# Altium PCB SimpleNode3.PcbDoc
Units mm, origin at the board's own origin, x right, y up, seen from the top; angles counter-clockwise.
Board outline 152.4 x 101.6 mm, 2 copper layers (Top Layer, Bottom Layer); 45 components, 43 nets, 176 pads, 13 vias.
Unrouted connection lines stored in the file: 68.
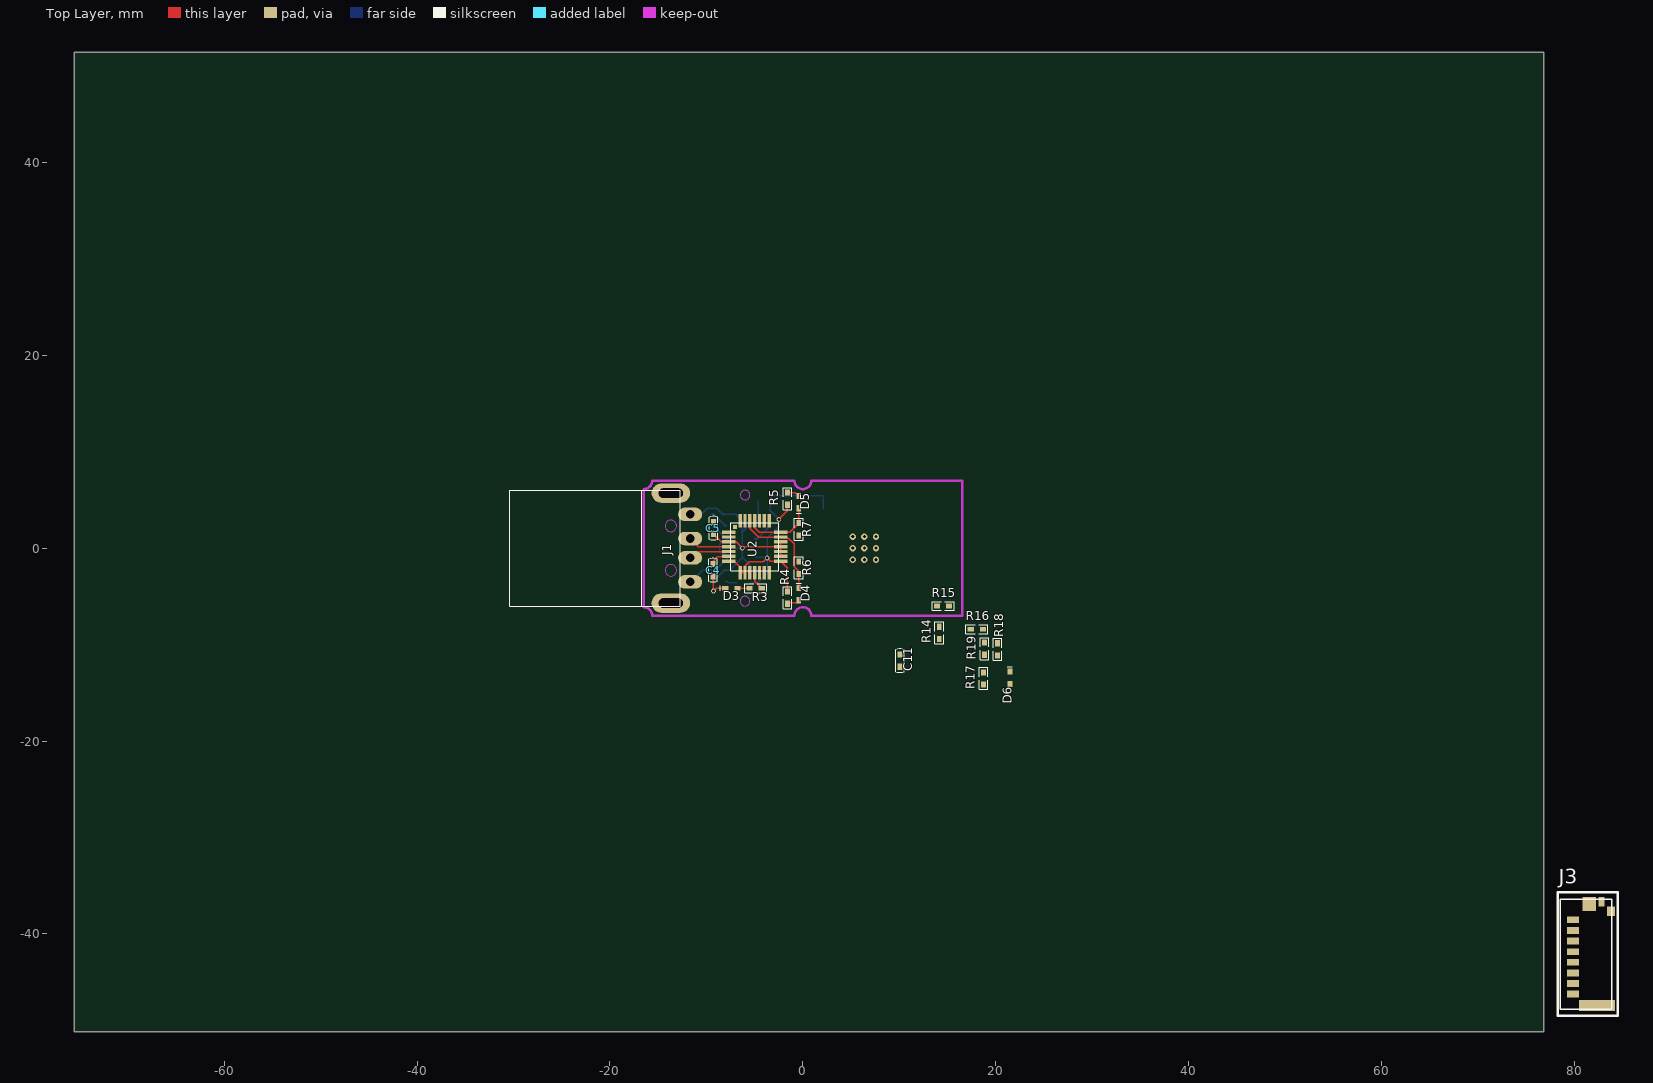
[diagram p0: Top Layer view]
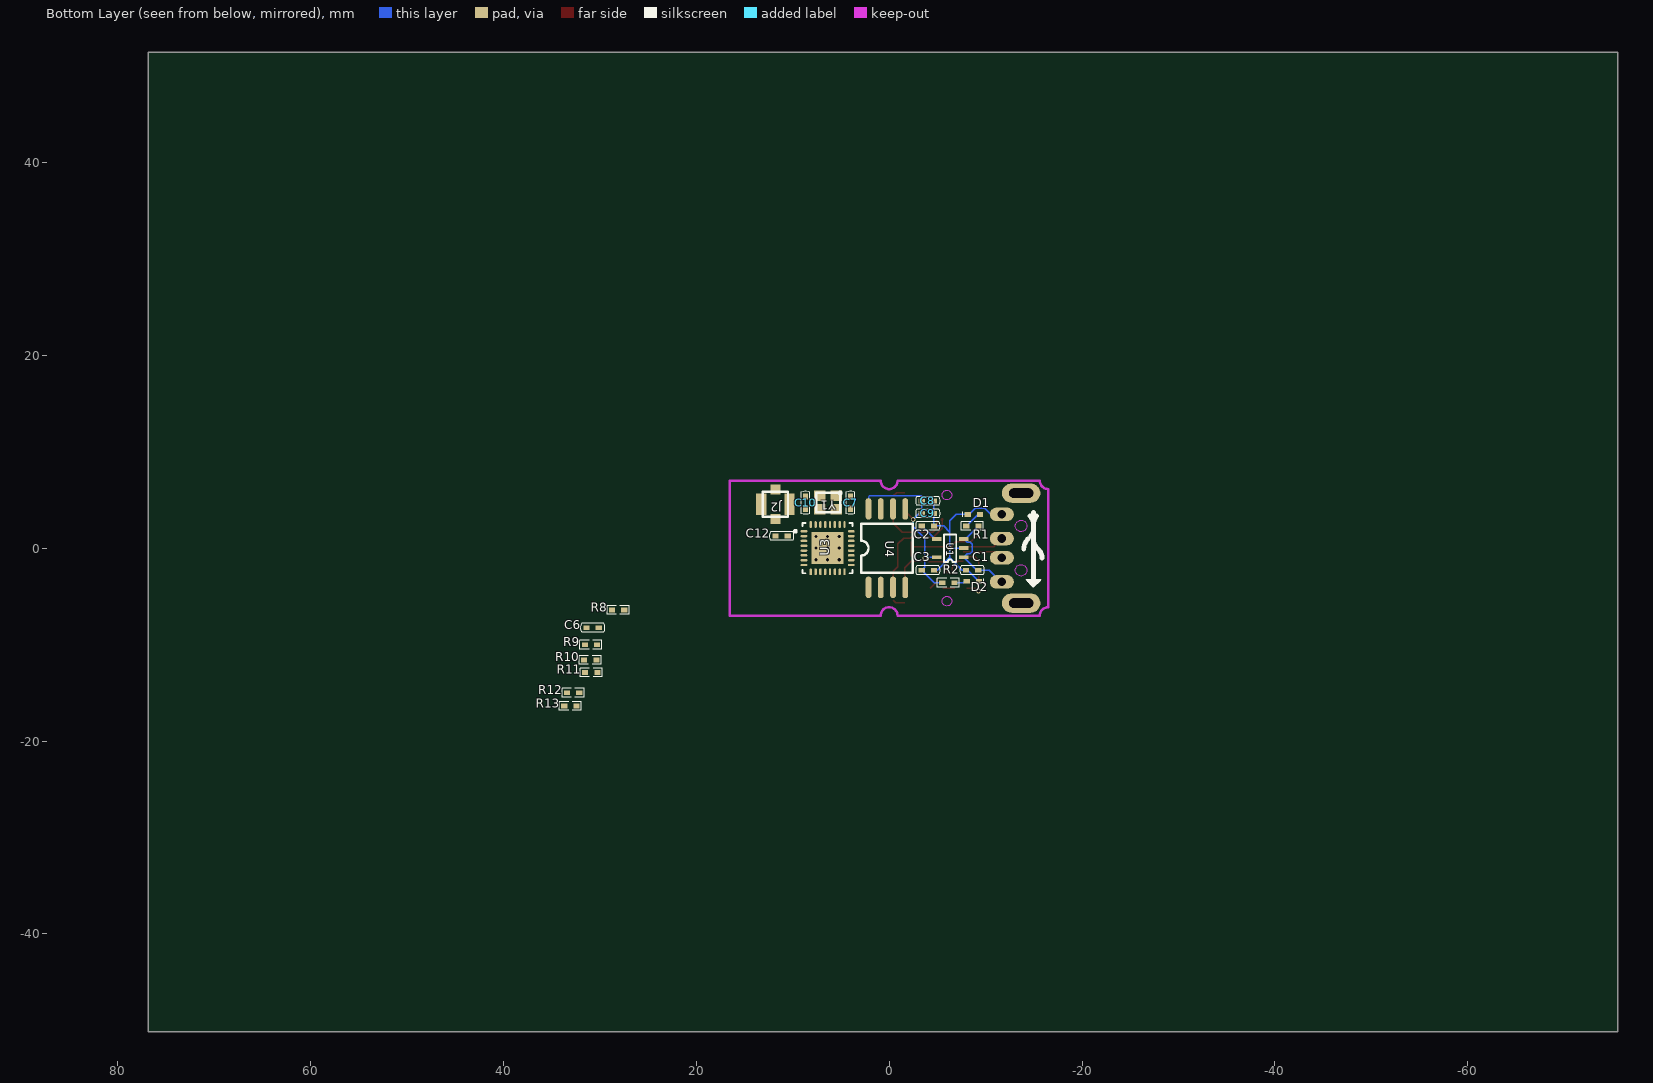
[diagram p1: Bottom Layer view, seen from below]

## Layer stack, top to bottom
Top Layer: signal copper 0.0356
Dielectric: dielectric 0.32, FR-4, Dk 4.8
Bottom Layer: signal copper 0.0356

## Board outline
-75.565,-50.165 76.835,-50.165 76.835,51.435 -75.565,51.435

## Design rules (kind name [scope] priority, off if disabled: settings)
Clearance [All] p1: gap=0.152
DiffPairsRouting DiffPair_DiffPairsRouting [InDifferentialPair ('USB Data Line Pair')] p1: maxlimit=0.254 minlimit=0.254 mostfreqgap=0.254 maxuncoupledlength=12.7
DiffPairsRouting [All] p2: maxlimit=0.254 minlimit=0.254 mostfreqgap=0.254 maxuncoupledlength=12.7
MatchedLengths DiffPair_MatchedLengths [InDifferentialPair ('USB Data Line Pair')] p1: tolerance=25.4 checknetsindiffpair=TRUE checkdiffpairvsdiffpair=TRUE checkothers=TRUE
MinimumSolderMaskSliver [All] p1 off: minsoldermaskwidth=0.127
PolygonConnect [All] p1: connectstyle=Relief reliefconductorwidth=0.254 reliefentries=4 polygonreliefangle="90 Angle"
RoutingVias [All] p1: holewidth=0.711 width=1.27 viastyle="Through Hole" minholewidth=0.305 minwidth=0.483 maxholewidth=0.711 maxwidth=1.27
SilkToSilkClearance [All] p1 off: silktosilkclearance=0
SilkscreenOverComponentPads [All] p1 off: minsilkscreentomaskgap=0.254
SolderMaskExpansion [All] p1: expansion=0.102
Width DiffPair_Width [InDifferentialPair('USB Data Line Pair')] p1: maxlimit=0.254 minlimit=0.152 preferedwidth=0.254
Width [All] p2: maxlimit=0.254 minlimit=0.152 preferedwidth=0.152
24 further rules are at their usual default settings.

## Classes and differential pairs
differential pair "USB Data Line Pair": +UD_P -UD_N

## Components (designator, comment, footprint, x,y, rotation, side; value= is the part's Value field where it differs from the comment)
C1 "105" C0402 -8.611,-2.286 r180 bottom
C2 "CAP" C0402 -4.013,2.311 r0 bottom
C3 "CAP" C0402 -4.013,-2.286 r0 bottom
C4 "CAP" C0402 -9.319,-2.286 r90 top
C5 "CAP" C0402 -9.271,2.083 r270 top
C6 "10V" C0402 30.734,-8.255 r180 bottom
C7 "10V" C0402 3.988,4.724 r270 bottom
C8 "10V" C0402 -4.013,4.902 r0 bottom
C9 "10V" C0402 -4.013,3.607 r0 bottom
C10 "10V" C0402 8.661,4.724 r90 bottom
C11 "10V" C0402 10.058,-11.659 r90 top
C12 "10V" C0402 11.151,1.245 r180 bottom
D1 "PW5V" LED0402 -8.788,3.505 r0 bottom
D2 "LED" LED0402 -8.687,-3.429 r180 bottom
D3 "STA" LED0402 -7.417,-4.166 r180 top
D4 "TXD" LED0402 -0.432,-4.775 r90 top
D5 "LED" LED0402 -0.432,4.775 r270 top
D6 "RST" LED0402 21.463,-13.437 r90 top
J1 "USB-A" "USB-A 公头" -13.691,0 r0 top
J2 "50ohm" "IPEX-1 底座" 11.786,4.547 r270 bottom
J3 "Micro TFCard" "TFCard 卡座 短体" 84.506,-48.489 r90 top
R1 "5%" R0402 -8.636,2.311 r180 bottom
R2 "5%" R0402 -6.147,-3.581 r180 bottom
R3 "5%" R0402 -4.902,-4.166 r0 top
R4 "5%" R0402 -1.6,-5.131 r270 top
R5 "5%" R0402 -1.6,5.131 r270 top
R6 "5%" R0402 -0.432,-2.032 r90 top
R7 "5%" R0402 -0.432,1.956 r270 top
R8 "1%" R0402 28.092,-6.401 r0 bottom
R9 "1%" R0402 30.912,-10.008 r180 bottom
R10 "1%" R0402 30.988,-11.582 r180 bottom
R11 "1%" R0402 30.886,-12.878 r180 bottom
R12 "5%" R0402 32.766,-14.986 r0 bottom
R13 "FLASH" R0402 33.045,-16.358 r180 bottom
R14 "1%" R0402 14.148,-8.788 r270 top
R15 "1%" R0402 14.529,-5.994 r0 top
R16 "NC" R0402 18.034,-8.407 r180 top
R17 "5%" R0402 18.72,-13.513 r90 top
R18 "5%" R0402 20.168,-10.49 r270 top
R19 "RESET" R0402 18.821,-10.414 r90 top
U1 "SPX3819M5-L-3-3" SOT25-5 -6.325,0.076 r0 bottom locked
U2 "CP2102" MLP28 -5.055,0 r0 top locked
U3 "ESP8266" QFN32L 6.375,0 r180 bottom
U4 "2M Flash" SOIC8 2.134,-4.064 r90 bottom
Y1 "10ppm" XTAL-2520 6.325,4.724 r0 bottom

## Footprints (in the part's own frame and the unit in brackets; to place one, negate y for a bottom-side part, rotate by r counter-clockwise, add the part's x,y. Pads: shape width x height; smd on the part's side, far side on the other; paste and mask are expansions set on the pad)
C0402 [mm]
  rect 0.635x0.5 smd: 1(-0.635,0) 2(0.635,0)
  silkscreen extent -1.22,-0.45 1.22,0.45
"IPEX-1 底座" [mm]
  rect 1.05x1 smd: 1(1.525,0) 4(-1.525,0)
  rect 2.2x1.05 smd: 2(0,1.475) 3(0,-1.475)
  silkscreen extent -1.3,-1.3 1.3,1.3
LED0402 [mm]
  rect 0.635x0.5 smd: 1(-0.632,0) 2(0.633,0)
  silkscreen extent 1.14,-0.25 1.14,0.25
MLP28 [mm]
  rect 1.4x0.35 smd: 1(-2.646,1.651) 2(-2.646,1.151) 3(-2.646,0.651) 4(-2.646,0.151) 5(-2.646,-0.349) 6(-2.646,-0.849) 7(-2.646,-1.349) 15(2.754,-1.349) 16(2.754,-0.849) 17(2.754,-0.349) 18(2.754,0.151) 19(2.754,0.651) 20(2.754,1.151) 21(2.754,1.651)
  rect 0.35x1.4 smd: 8(-1.446,-2.549) 9(-0.946,-2.549) 10(-0.446,-2.549) 11(0.054,-2.549) 12(0.554,-2.549) 13(1.054,-2.549) 14(1.554,-2.549) 22(1.554,2.851) 23(1.054,2.851) 24(0.554,2.851) 25(0.054,2.851) 26(-0.446,2.851) 27(-0.946,2.851) 28(-1.446,2.851)
  rect 0.435x0.435 smd: ""(-1.978,2.183)
  silkscreen extent -2.45,-2.35 2.55,2.65
QFN32L [mm]
  oval 0.7x0.25 smd: 1(-2.45,1.75) 2(-2.45,1.25) 3(-2.45,0.75) 4(-2.45,0.25) 5(-2.45,-0.25) 6(-2.45,-0.75) 7(-2.45,-1.25) 8(-2.45,-1.75) 17(2.45,-1.75) 18(2.45,-1.25) 19(2.45,-0.75) 20(2.45,-0.25) 21(2.45,0.25) 22(2.45,0.75) 23(2.45,1.25) 24(2.45,1.75)
  oval 0.25x0.7 smd: 9(-1.75,-2.45) 10(-1.25,-2.45) 11(-0.75,-2.45) 12(-0.25,-2.45) 13(0.25,-2.45) 14(0.75,-2.45) 15(1.25,-2.45) 16(1.75,-2.45) 25(1.75,2.45) 26(1.25,2.45) 27(0.75,2.45) 28(0.25,2.45) 29(-0.25,2.45) 30(-0.75,2.45) 31(-1.25,2.45) 32(-1.75,2.45)
  rect 3.3x3.3 smd: 33(0,0)
  silkscreen extent -3.48,-2.6 2.6,2.6, body extent -2.58,-2.58 2.58,2.58, height 0.8
R0402 [mm]
  rect 0.635x0.5 smd: 1(-0.635,0) 2(0.635,0)
  silkscreen extent -1.14,-0.45 1.14,0.45
SOIC8 [mil]
  oval 88x24 smd: 1(0,0) 2(0,-50) 3(0,-100) 4(0,-150) 5(320,-150) 6(320,-100) 7(320,-50) 8(320,0)
  silkscreen extent 60,-180 260,30, body extent -5,-181 325,31, height 91
SOT25-5 [mm]
  rect 1x0.4 smd: 1(-1.397,1.016) 2(-1.397,0.066) 3(-1.397,-0.884) 4(1.403,-0.884) 5(1.403,1.016)
  silkscreen extent -0.64,-1.36 0.64,1.49
"TFCard 卡座 短体" [mm]
  rect 0.7x1.25 smd: 1(9.95,4.675) 2(8.85,4.675) 3(7.75,4.675) 4(6.65,4.675) 5(5.55,4.675) 6(4.45,4.675) 7(3.35,4.675) 8(2.25,4.675)
  rect 1.15x3.75 smd: 9(1.08,2.175)
  rect 1.45x1.4 smd: 10(11.585,2.95)
  rect 1x0.6 smd: 11(11.81,1.7)
  rect 0.95x0.85 smd: 12(10.835,0.725)
  silkscreen extent 0,0 12.8,6.25
"USB-A 公头" [mm]
  oval 1.5x1.4 on Bottom Overlay: 1(-1.27,3.683)
  oval 2.5x1.4 hole 0.9: 1(2,-3.5) 2(2,-1) 3(2,1) 4(2,3.5)
  oval 4x2 hole 1 slot 2.5 at 0 deg: 4(0,-5.7) 4(0,5.7)
  Keep-Out Layer circle w0.05: c0,-2.3 r0.6
  Keep-Out Layer circle w0.05: c0,2.3 r0.6
  silkscreen extent -16.7,-6 1,6
XTAL-2520 [mm]
  rect 1.2x1.1 smd: 1(-0.85,-0.7) 2(0.85,-0.7) 3(0.85,0.7) 4(-0.85,0.7)
  silkscreen extent -1.38,-1.13 1.25,1

## Part data
U1: library part SPX381
U4: library part GD

## Via types
v1: diameter 0.66, hole 0.33, Top Layer to Bottom Layer, tented top, 9 vias
v2: diameter 0.483, hole 0.305, Top Layer to Bottom Layer, 4 vias

## Nets (pads, with @x,y where several pads share a name; then routed paths per layer and width w, separated by ;. In a path a pad name is that pad's centre, name@x,y a point inside that pad or via, vN(x,y) a via of type N, cw(c..) or ccw(c..) an arc to the next point about the centre after c; other vN are vias at no path point)
ADC: U3.6
GND: C1.1 C2.1 C3.1 C4.1 C5.2 C6.1 C7.2 C8.1 C9.1 C10.2 C11.1 D1.2 D2.2 D3.2 J1.4 J2.2 J2.3 J2.4 J3.6 R9.1 R13.1 R14.2 R19.1 U1.2 U2.3 U2.16 U2.17 U2.18 U2.19 U3.33 U4.4 Y1.2 Y1.4 | length 35.1
  Top Layer w0.152: v2@-9.319,-4.397 C4.1 ; v2(-9.271,-4.445) -8.992,-4.166 D3.2 ; C5.2 -8.474,0.651 U2.3 -6.925,0.651 v2(-6.274,0) -6.121,0.152 U2.18@-2.302,0.152 ; U2.16 U2.17 U2.18 U2.19
  Bottom Layer w0.152: J1.4@-11.589,3.5 -10.532,3.5 -9.896,4.136 -8.946,4.136 D1.2@-8.315,3.505 ; D2.2 -9.271,-3.477 v2(-9.271,-4.445) ; D2.2@-9.282,-3.429 C1.1@-8.139,-2.286 ; D1.2 -6.96,3.505 -6.299,2.845 -6.299,1.651 ; C1.1 -7.569,-2.286 -6.299,-1.016 -6.299,-0.965 ; U1.2@-7.711,0 v2@-6.299,0 ; C3.1 -4.978,-2.286 -6.299,-0.965 ; C8.1 C9.1 C2.1 -5.639,2.311 -6.299,1.651 ; -6.299,-0.965 v2@-6.299,0 ; v2@-6.299,0 -6.299,1.651
  Bottom Layer w0.254: D2.2 D2.2@-9.282,-3.429 ; D1.2@-8.315,3.505 D1.2 ; C1.1@-8.139,-2.286 C1.1 ; v2@-6.299,0 v2(-6.274,0)
  other v1: 5.175,-1.2 6.375,-1.2 7.575,-1.2 5.175,0 6.375,0 7.575,0 5.175,1.2 6.375,1.2 7.575,1.2
GPIO0: R11.2 R12.1 U3.15
GPIO2: R10.2 U3.14
GPIO4: J3.5 U3.16
GPIO5: J3.3 U3.24
GPIO12: J3.7 U3.10
GPIO13: J3.2 U3.12
GPIO14: J3.8 U3.9
GPIO15: J3.1 R9.2 U3.13
GPIO16: D6.2 R18.1 U3.8
NetC2_2: C2.2 U1.4 | length 2.1
  Bottom Layer w0.152: U1.4@-4.729,0.96 C2.2
  Bottom Layer w0.254: U1.4 U1.4@-4.729,0.96
NetC4_2: C4.2 U2.6 | length 2.1
  Top Layer w0.152: C4.2 -9.319,-1.343 -8.873,-0.897 U2.6@-7.748,-0.897
NetC7_1: C7.1 U3.27 Y1.1
NetC10_1: C10.1 U3.28 Y1.3
NetC11_2: C11.2 R15.1 R16.2 U3.32
NetC12_1: C12.1 J2.1
NetC12_2: C12.2 U3.2
NetD1_1: D1.1 R1.1 | length 1.9
  Bottom Layer w0.152: D1.1@-9.262,3.505 R1.1@-8.068,2.311
  Bottom Layer w0.254: D1.1 D1.1@-9.262,3.505 ; R1.1@-8.068,2.311 R1.1
NetD2_1: D2.1 R2.2 | length 1.3
  Bottom Layer w0.152: D2.1 -7.851,-3.429 -7.699,-3.581 R2.2
NetD3_1: D3.1 R3.1 | length 1.2
  Top Layer w0.152: D3.1 R3.1
NetD4_1: D4.1 R4.2 | length 1.3
  Top Layer w0.152: R4.2@-1.6,-5.639 -0.663,-5.639 D4.1
NetD5_1: D5.1 R5.1 | length 1.3
  Top Layer w0.152: R5.1 -0.79,5.766 D5.1
NetD6_1: D6.1 R17.2
NetR3_2: R3.2 U2.11 | length 1.4
  Top Layer w0.152: U2.11@-5,-3.189 -5,-3.432 R3.2 ; U2.11 U2.11@-5,-2.422
NetR8_2: R8.2 U3.7
NetR12_2: R12.2 R13.2
NetR14_1: R14.1 U3.31
NetR16_1: R16.1 R18.2 R19.2
RXD: D5.2 R7.1 U2.21 U2.25 | length 7.6
  Top Layer w0.152: U2.25 -5,2.105 -4.547,1.651 U2.21 -1.372,1.651 R7.1 D5.2 ; U2.25@-4.902,2.752 U2.25@-4.902,2.879
SD_CLK: U3.21 U4.6
SD_CMD: U3.20 U4.1
SD_DATA_0: U3.22 U4.2
SD_DATA_1: U3.23 U4.5
SD_DATA_2: U3.18 U4.7
SD_DATA_3: U3.19 U4.3
TXD: D4.2 R6.1 U2.20 U2.26 | length 10.6
  Top Layer w0.152: U2.26 -5.5,2.084 -4.567,1.151 U2.20 -2.202,1.052 -1.507,1.052 -0.908,0.453 -0.908,-1.941 R6.1@-0.432,-2.417 ; D4.2 R6.1
  Top Layer w0.254: U2.26@-5.5,2.978 U2.26@-5.452,2.93
U0RXD: R6.2 U3.25
U0TXD: R7.2 U3.26
UD_N: J1.2 U2.5 | length 4.3
  Top Layer w0.152: J1.2 -11.04,-0.349 U2.5
UD_P: J1.3 U2.4 | length 4.3
  Top Layer w0.152: J1.3 -10.842,0.151 U2.4
VCC3V3: C3.2 C5.1 C6.2 C8.2 C9.2 J3.4 R2.1 R4.1 R5.2 R8.1 R10.1 R11.1 R15.2 R17.1 U1.5 U2.7 U2.8 U2.9 U2.15 U3.1 U3.3 U3.4 U3.11 U3.17 U3.29 U3.30 U4.8 | length 32.1
  Top Layer w0.152: U2.7 -7.109,-1.349 -6.525,-1.933 -6.525,-2.524 U2.8 U2.9@-6.071,-2.549 ; U2.9 U2.9@-6.071,-2.549 ; U2.9@-5.902,-2.45 U2.9@-5.902,-2.323 ; v2(-2.489,2.972) -1.6,3.861 R5.2 ; R4.1@-1.6,-4.369 -1.6,-2.049 U2.15 -3.375,-1.349 v2(-3.708,-1.016) -4.089,-1.397 -5.543,-1.397 -6.071,-1.924 U2.9@-6.071,-2.549
  Bottom Layer w0.152: R2.1 -4.674,-3.581 C3.2 -3.708,-1.956 v2(-3.708,-1.016) -3.708,1.022 -2.489,2.241 v2(-2.489,2.972) -3.378,3.861 C8.2 -3.378,5.41 2.057,5.41 2.134,5.334 U4.8 ; U1.5 v2@-3.785,-0.94
VCC5V: C1.2 J1.1@-11.691,-3.5 R1.2 U1.1 U1.3 | length 10.6
  Bottom Layer w0.152: J1.1@-11.64,-3.551 -10.375,-2.286 C1.2 ; R1.2 U1.3@-7.92,0.96 ; C1.2@-9.082,-2.286 -7.736,-0.94 -8.105,-0.571 -8.379,-0.571 -8.603,-0.348 -8.603,0.414 -8.426,0.591 -8.091,0.591 U1.3
  Bottom Layer w0.254: J1.1@-10.927,-3.5 J1.1@-10.572,-3.5 ; U1.3@-8.057,0.96 U1.3 U1.3@-7.92,0.96 ; U1.1@-7.736,-0.94 U1.1
pads on no net: J1.1@-14.961,3.683 J3.9 J3.10 J3.11 J3.12 U2. U2.1 U2.2 U2.10 U2.12 U2.13 U2.14 U2.22 U2.23 U2.24 U2.27 U2.28 U3.5

## Keep-outs
Keep-Out Layer:
  circle w0.1: c-6,5.5 r0.5
  circle w0.1: c-6,-5.5 r0.5
  lines w0.254: -15.625,-7 ccw(c-16.5,-7) -16.5,-6.125 -16.5,6.125 ccw(c-16.5,7) -15.625,7 -0.875,7 ccw(c0,7) 0.875,7 16.5,7 16.5,-7 0.875,-7 ccw(c0,-7) -0.875,-7 -15.621,-7